# EAGLE board proto2 (EAGLE 6.1)
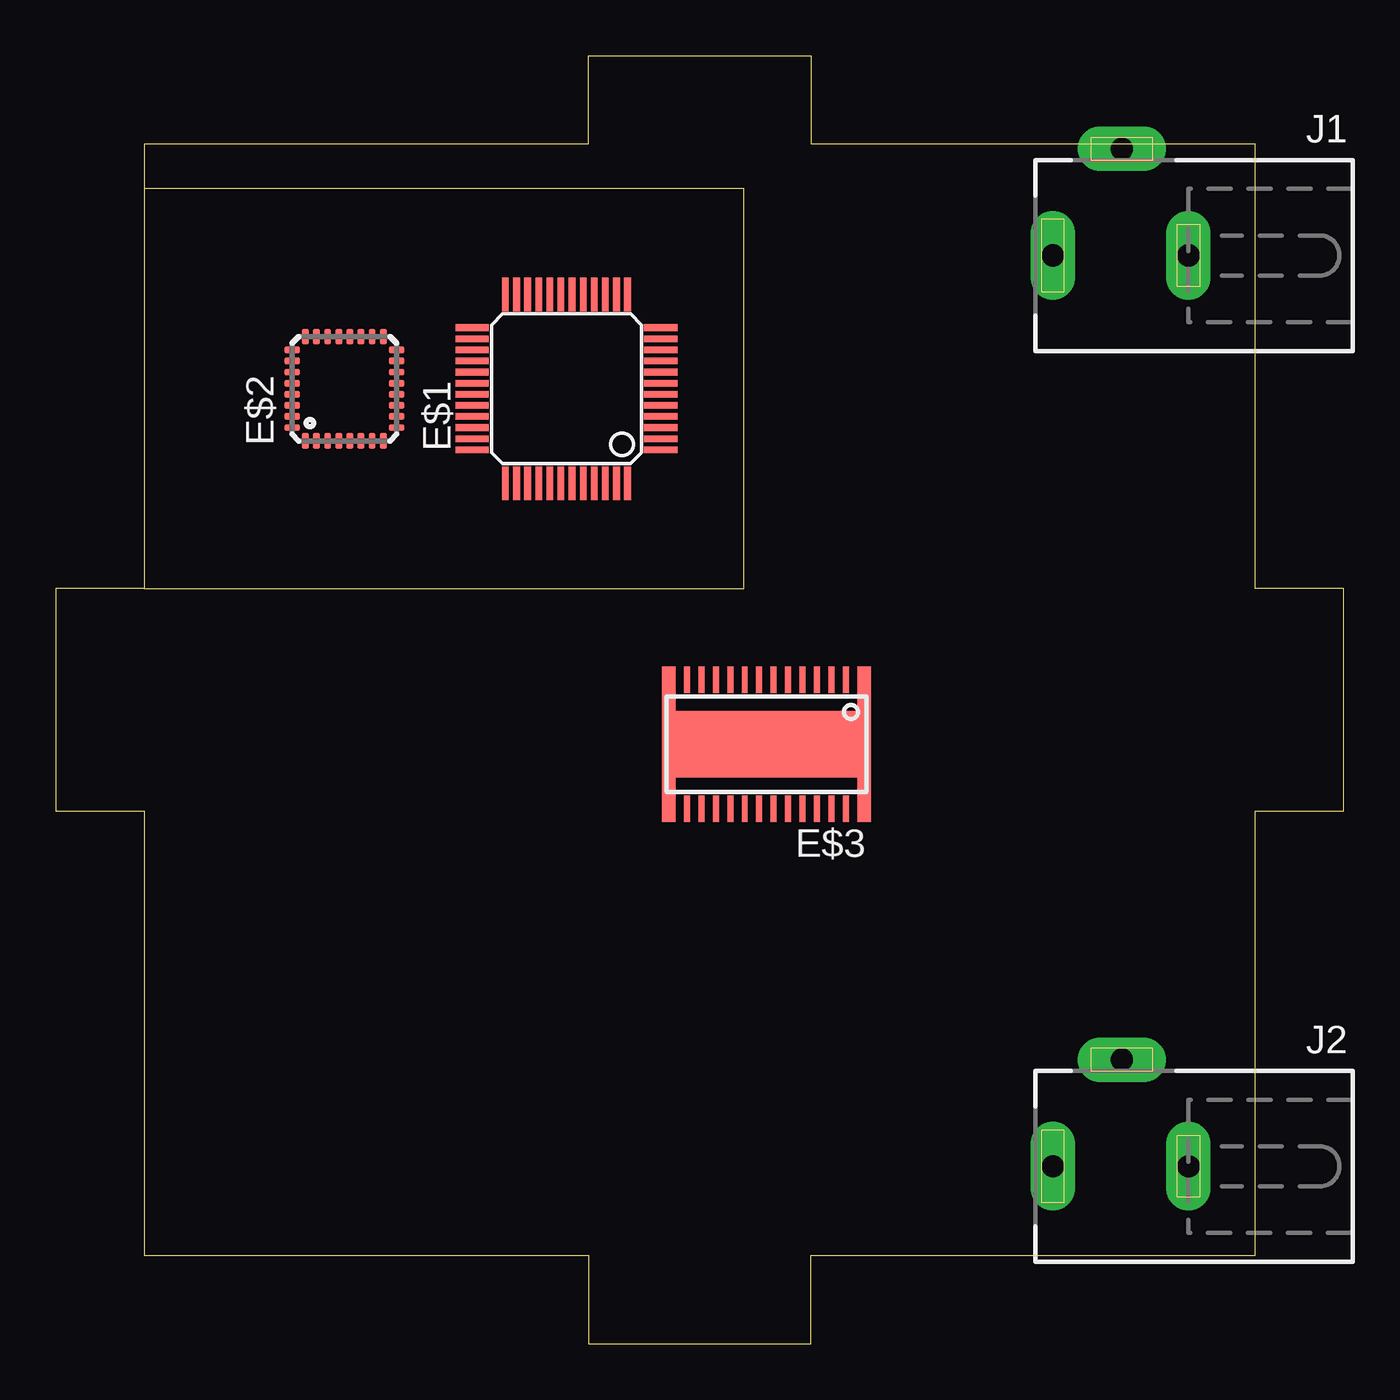
[diagram p0: board, top side]
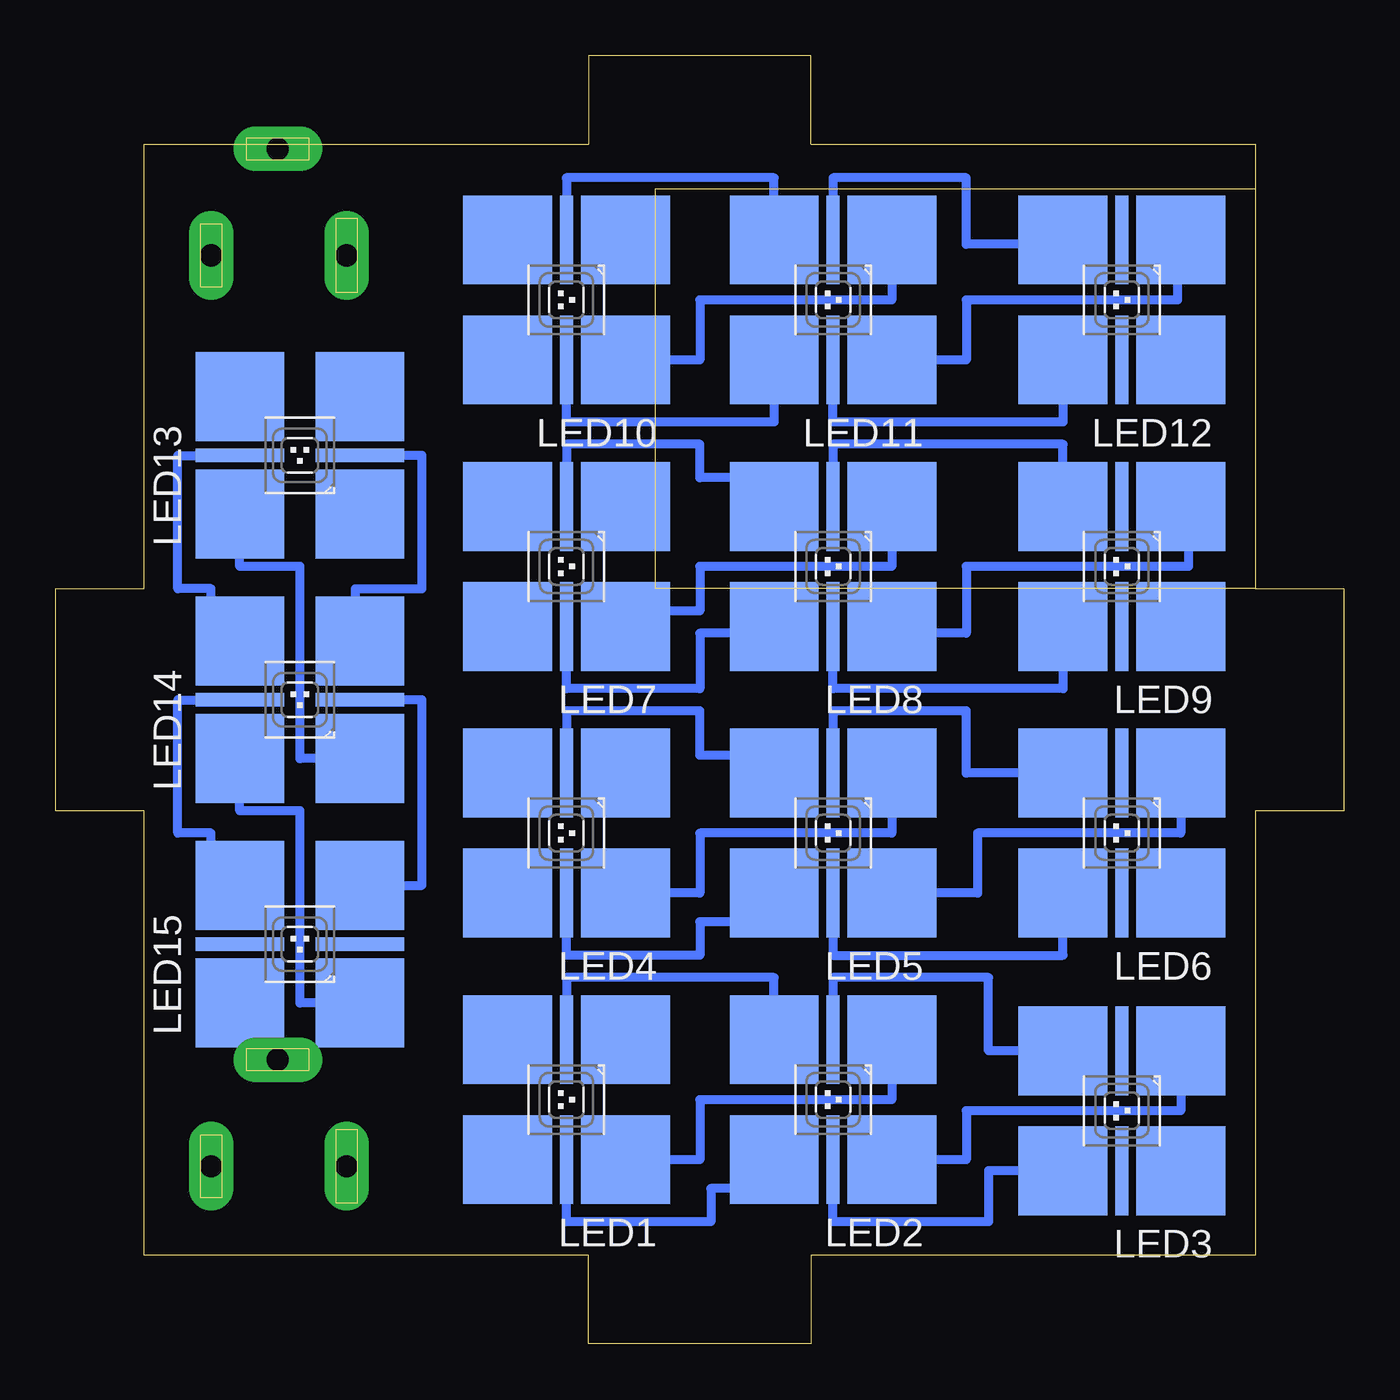
[diagram p1: board, bottom side, seen from below]

Size 58 x 58 mm. Coordinates in mm from the lower left corner, seen from the top.
Outline: 4,52 4,54 24,54 24,58 34,58 34,54 54,54 54,34 58,34 58,24 54,24 54,4 34,4 34,0 24,0 24,4 4,4 4,24 0,24 0,34 4,34
Outline: 4,52 31,52 31,34 4,34
Outline: 4,52 4,34
Copper layers (1*16): Top 0.035mm / dielectric 1.5mm / Bottom 0.035mm
Design rules: minimum track width 10mil, minimum drill 24mil, track to track 8mil, track to pad 8mil, pad to pad 8mil, via to via 8mil, smd to smd 8mil, copper to edge 40mil, drill to drill 8mil, minimum pad ring 10mil, minimum via ring 8mil, stop-mask expansion 4mil, vias tented up to drill 0mil, thermal gap 10mil

## Footprints (pad centres in the part's own frame; a part is rotated, then mirrored left to right if it is on the bottom)
TQFP48 = smd 0.3 x 1.5: 1 -2.75,-4.25; 2 -2.25,-4.25; 3 -1.75,-4.25; 4 -1.25,-4.25; 5 -0.75,-4.25; 6 -0.25,-4.25; 7 0.25,-4.25; 8 0.75,-4.25; 9 1.25,-4.25; 10 1.75,-4.25; 11 2.25,-4.25; 12 2.75,-4.25; 25 2.75,4.25; 26 2.25,4.25; 27 1.75,4.25; 28 1.25,4.25; 29 0.75,4.25; 30 0.25,4.25; 31 -0.25,4.25; 32 -0.75,4.25; 33 -1.25,4.25; 34 -1.75,4.25; 35 -2.25,4.25; 36 -2.75,4.25 | smd 1.5 x 0.3: 13 4.25,-2.75; 14 4.25,-2.25; 15 4.25,-1.75; 16 4.25,-1.25; 17 4.25,-0.75; 18 4.25,-0.25; 19 4.25,0.25; 20 4.25,0.75; 21 4.25,1.25; 22 4.25,1.75; 23 4.25,2.25; 24 4.25,2.75; 37 -4.25,2.75; 38 -4.25,2.25; 39 -4.25,1.75; 40 -4.25,1.25; 41 -4.25,0.75; 42 -4.25,0.25; 43 -4.25,-0.25; 44 -4.25,-0.75; 45 -4.25,-1.25; 46 -4.25,-1.75; 47 -4.25,-2.25; 48 -4.25,-2.75
MLF32 = smd 0.7 x 0.3: 1 -2.35,1.75; 2 -2.35,1.25; 3 -2.35,0.75; 4 -2.35,0.25; 5 -2.35,-0.25; 6 -2.35,-0.75; 7 -2.35,-1.25; 8 -2.35,-1.75; 17 2.35,-1.75; 18 2.35,-1.25; 19 2.35,-0.75; 20 2.35,-0.25; 21 2.35,0.25; 22 2.35,0.75; 23 2.35,1.25; 24 2.35,1.75 | smd 0.3 x 0.7: 9 -1.75,-2.35; 10 -1.25,-2.35; 11 -0.75,-2.35; 12 -0.25,-2.35; 13 0.25,-2.35; 14 0.75,-2.35; 15 1.25,-2.35; 16 1.75,-2.35; 25 1.75,2.35; 26 1.25,2.35; 27 0.75,2.35; 28 0.25,2.35; 29 -0.25,2.35; 30 -0.75,2.35; 31 -1.25,2.35; 32 -1.75,2.35
HTSSOP28PWP = smd 0.61 x 2.1: 1 -4.395,-2.45; 14 4.395,-2.45; 15 4.395,2.45; 28 -4.395,2.45 | smd 0.27 x 1.2: 2 -3.575,-2.9; 3 -2.925,-2.9; 4 -2.275,-2.9; 5 -1.625,-2.9; 6 -0.975,-2.9; 7 -0.325,-2.9; 8 0.325,-2.9; 9 0.975,-2.9; 10 1.625,-2.9; 11 2.275,-2.9; 12 2.925,-2.9; 13 3.575,-2.9; 16 3.575,2.9; 17 2.925,2.9; 18 2.275,2.9; 19 1.625,2.9; 20 0.975,2.9; 21 0.325,2.9; 22 -0.325,2.9; 23 -0.975,2.9; 24 -1.625,2.9; 25 -2.275,2.9; 26 -2.925,2.9; 27 -3.575,2.9 | smd 9.4 x 3: EXP 0,0
DCJ0303 = drill 1 pad 2 long: 1 0,3.1; 2 4.8,0; 3 0,-3
P-LCC-6_TOPLED = smd 4 x 4: A1 -2.65,-2.7; A2 2.65,-2.7; A3 2.65,2.7; C1 -2.65,2.7 | smd 0.6 x 4: C2 0,-2.7; C3 0,2.7

## Placement (x,y rotation side)
E$1  [TQFP48]  23,43 90 top
E$2  [MLF32]  13,43 90 top
E$3  [HTSSOP28PWP]  32,27 180 top
J1  [DCJ0303]  48,49 90 top
J2  [DCJ0303]  48,8 90 top
LED1  MULTILED_LRTB_G6TG  [P-LCC-6_TOPLED]  35,11 180 bottom
LED2  MULTILED_LRTB_G6TG  [P-LCC-6_TOPLED]  23,11 180 bottom
LED3  MULTILED_LRTB_G6TG  [P-LCC-6_TOPLED]  10,10.5 180 bottom
LED4  MULTILED_LRTB_G6TG  [P-LCC-6_TOPLED]  35,23 180 bottom
LED5  MULTILED_LRTB_G6TG  [P-LCC-6_TOPLED]  23,23 180 bottom
LED6  MULTILED_LRTB_G6TG  [P-LCC-6_TOPLED]  10,23 180 bottom
LED7  MULTILED_LRTB_G6TG  [P-LCC-6_TOPLED]  35,35 180 bottom
LED8  MULTILED_LRTB_G6TG  [P-LCC-6_TOPLED]  23,35 180 bottom
LED9  MULTILED_LRTB_G6TG  [P-LCC-6_TOPLED]  10,35 180 bottom
LED10  MULTILED_LRTB_G6TG  [P-LCC-6_TOPLED]  35,47 180 bottom
LED11  MULTILED_LRTB_G6TG  [P-LCC-6_TOPLED]  23,47 180 bottom
LED12  MULTILED_LRTB_G6TG  [P-LCC-6_TOPLED]  10,47 180 bottom
LED13  MULTILED_LRTB_G6TG  [P-LCC-6_TOPLED]  47,40 90 bottom
LED14  MULTILED_LRTB_G6TG  [P-LCC-6_TOPLED]  47,29 90 bottom
LED15  MULTILED_LRTB_G6TG  [P-LCC-6_TOPLED]  47,18 90 bottom

## Library data of the parts
E$1 = ref-packages
E$2 = atmel
E$3 = texas
J1 J2 = con-jack; OC_FARNELL: unknown; OC_NEWARK: unknown
LED1-LED15 = led

## Nets
N$1: LED1.C1 LED2.A1
N$2: LED1.C2 LED2.A2
N$3: LED1.C3 LED2.A3
N$4: LED2.C3 LED3.A3
N$5: LED2.C2 LED3.A2
N$6: LED2.C1 LED3.A1
N$7: LED4.C1 LED5.A1
N$8: LED4.C2 LED5.A2
N$9: LED4.C3 LED5.A3
N$10: LED5.C3 LED6.A3
N$11: LED5.C2 LED6.A2
N$12: LED5.C1 LED6.A1
N$13: LED7.C1 LED8.A1
N$14: LED7.C2 LED8.A2
N$15: LED7.C3 LED8.A3
N$16: LED8.C1 LED9.A1
N$17: LED8.C2 LED9.A2
N$18: LED8.C3 LED9.A3
N$19: LED11.C1 LED12.A1
N$20: LED10.C1 LED11.A1
N$21: LED10.C2 LED11.A2
N$22: LED11.C2 LED12.A2
N$23: LED10.C3 LED11.A3
N$24: LED11.C3 LED12.A3
N$25: LED13.C1 LED14.A1
N$26: LED13.C2 LED14.A2
N$27: LED13.C3 LED14.A3
N$28: LED14.C1 LED15.A1
N$29: LED14.C2 LED15.A2
N$30: LED14.C3 LED15.A3

## Tracks (layer width: path | path; a pad name or v marks a point on that pad's centre or on a via)
N$1
  Bottom 0.406: LED2.A1 20.35,11 29,11 29,8.3 LED1.C1
N$2
  Bottom 0.406: LED2.A2 25.65,16.5 35,16.5 LED1.C2
N$3
  Bottom 0.406: LED2.A3 25.65,7 28.5,7 28.5,5.5 35,5.5 LED1.C3
N$4
  Bottom 0.406: LED3.A3 16,7.8 16,5.5 23,5.5 LED2.C3
N$5
  Bottom 0.406: LED3.A2 16,13.2 16,16.5 23,16.5 LED2.C2
N$6
  Bottom 0.406: LED3.A1 7.35,10.5 17,10.5 17,8.3 LED2.C1
N$7
  Bottom 0.406: LED5.A1 20.35,23 29,23 29,20.3 LED4.C1
N$8
  Bottom 0.406: LED5.A2 25.65,26.5 29,26.5 29,28.5 35,28.5 LED4.C2
N$9
  Bottom 0.406: LED5.A3 25.65,19 29,19 29,17.5 35,17.5 LED4.C3
N$10
  Bottom 0.406: LED5.C3 23,17.5 12.65,17.5 LED6.A3
N$11
  Bottom 0.406: LED6.A2 17,25.7 17,28.5 23,28.5 LED5.C2
N$12
  Bottom 0.406: LED6.A1 7.35,23 16.5,23 16.5,20.3 LED5.C1
N$13
  Bottom 0.406: LED8.A1 20.35,35 29,35 29,33 32,33 32,32.3 LED7.C1
N$14
  Bottom 0.406: LED8.A2 25.65,39 29,39 29,40.5 35,40.5 LED7.C2
N$15
  Bottom 0.406: LED8.A3 25.65,32 29,32 29,29.5 35,29.5 LED7.C3
N$16
  Bottom 0.406: LED9.A1 7,37.7 7,35 17,35 17,32 20.35,32 LED8.C1
N$17
  Bottom 0.406: LED9.A2 12.65,40.5 23,40.5 LED8.C2
N$18
  Bottom 0.406: LED9.A3 12.65,29.5 23,29.5 LED8.C3
N$19
  Bottom 0.406: LED12.A1 7.5,50.7 7.5,47 17,47 17,44.3 LED11.C1
N$20
  Bottom 0.406: LED11.A1 20.35,47 29,47 29,44.3 LED10.C1
N$21
  Bottom 0.406: LED11.A2 25.65,52.5 35,52.5 LED10.C2
N$22
  Bottom 0.406: LED12.A2 12.65,49.5 17,49.5 17,52.5 23,52.5 LED11.C2
N$23
  Bottom 0.406: LED11.A3 25.65,41.5 35,41.5 LED10.C3
N$24
  Bottom 0.406: LED12.A3 12.65,41.5 23,41.5 LED11.C3
N$25
  Bottom 0.406: LED14.A1 47,26.35 47,35 49.7,35 LED13.C1
N$26
  Bottom 0.406: LED14.A2 44.5,31.65 44.5,34 41.5,34 41.5,40 LED13.C2
N$27
  Bottom 0.406: LED14.A3 51,31.65 51,34 52.5,34 52.5,40 LED13.C3
N$28
  Bottom 0.406: LED15.A1 47,15.35 47,24 49.7,24 LED14.C1
N$29
  Bottom 0.406: LED15.A2 41.5,20.65 41.5,29 LED14.C2
N$30
  Bottom 0.406: LED15.A3 51,19.65 51,23 52.5,23 52.5,29 LED14.C3